# Altium PCB TIDA01398_TID.PcbDoc (part 2 of 2)
Units mil, origin at the board's own origin, x right, y up, seen from the top; angles counter-clockwise.
Board outline 2952.76 x 1377.95 mil, 4 copper layers (Layer 1 - Top Layer, Layer 2 - GND, Layer 3 - PWR, Layer 4 - Bottom Layer), stack 43.668 mil thick; 120 components, 47 nets, 270 pads, 188 vias.
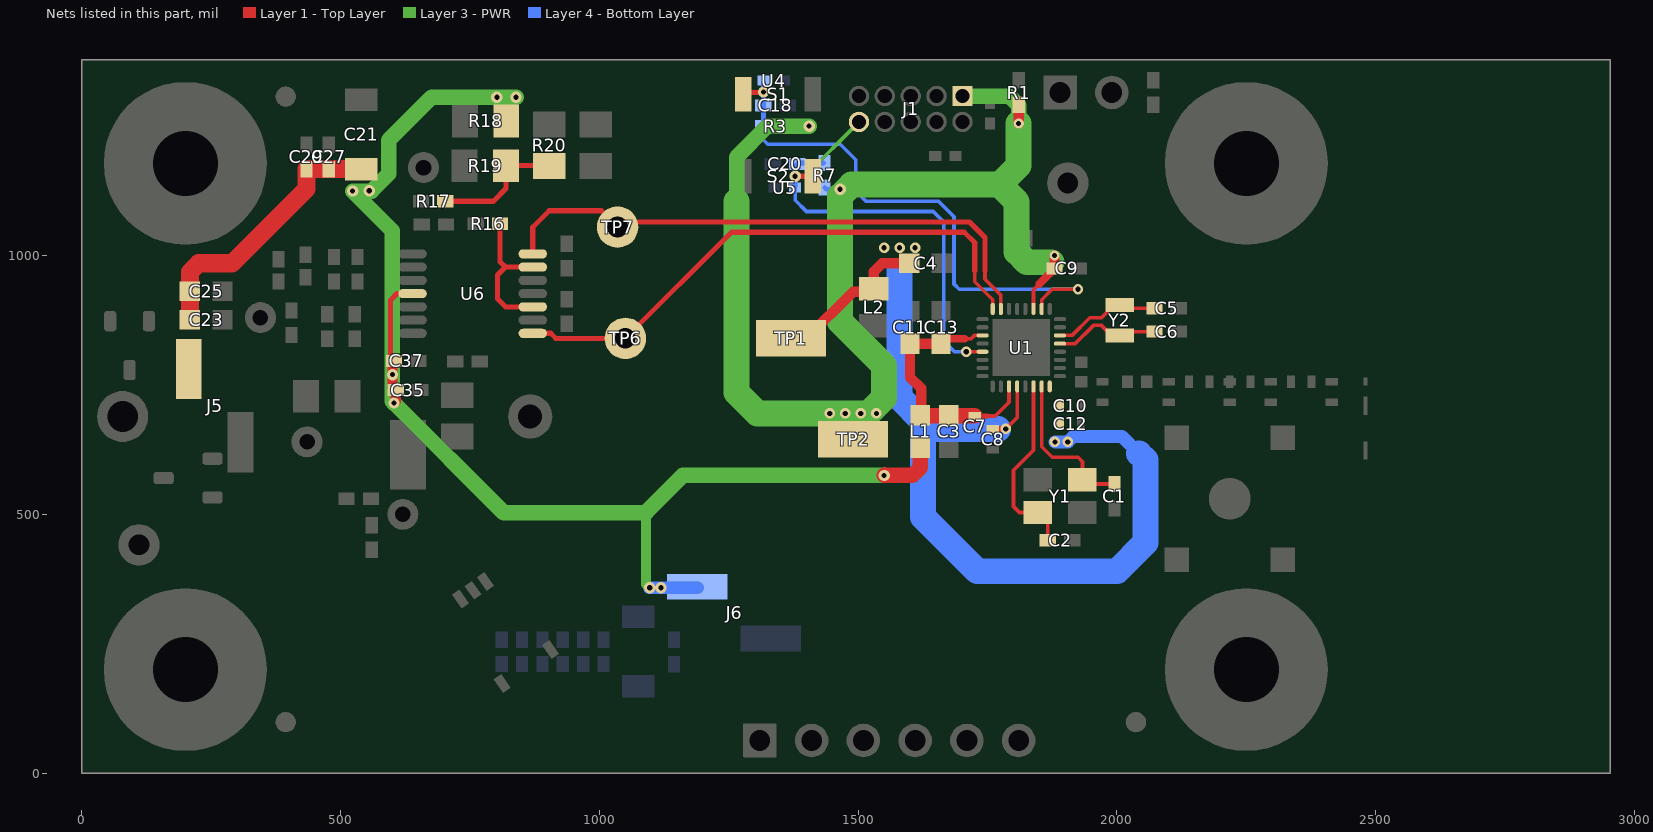
[diagram p4: the nets of this part, all layers, seen from the top]

## Via types
v1: diameter 20, hole 10, Layer 1 - Top Layer to Layer 4 - Bottom Layer, tented both sides, 125 vias
v2: diameter 22, hole 10, Layer 1 - Top Layer to Layer 4 - Bottom Layer, tented both sides, 47 vias
v3: diameter 19.68, hole 7.87, Layer 1 - Top Layer to Layer 4 - Bottom Layer, tented both sides, 16 vias

## Nets (pads, with @x,y where several pads share a name; then routed paths per layer and width w, separated by ;. In a path a pad name is that pad's centre, name@x,y a point inside that pad or via, vN(x,y) a via of type N, cw(c..) or ccw(c..) an arc to the next point about the centre after c; other vN are vias at no path point) (continued)
NetR16_2: R16.2 U6.10 U6.13 | length 283.1
  Layer 1 - Top Layer w10: R16.2@808,1061.46 808,987.82 818.18,977.64 ; U6.10@871.14,900.87 818.59,900.87 803,916.46 803,962.46 818.18,977.64 ; U6.13@871.14,977.64 818.18,977.64
NetR17_2: R17.2 R19.1 R20.2 | length 255.6
  Layer 1 - Top Layer w10: R17.2@702.24,1105 795,1105 819.48,1129.48 R19.1@819.48,1173.8 902.14,1173.8 R20.2@903,1172.94
NRESET: C20.2 J1.10 R7.1 S2.2 U1.21 U5.1 | length 942.4
  Layer 1 - Top Layer w7: v1(1708.75,814.13) U1.21@1740.2,814.13
  Layer 1 - Top Layer w10: v2(1378.09,1153.3) v2(1378.09,1153.3) S2.2@1411.93,1153.26
  Layer 3 - PWR w7: v2(1378.09,1153.3) 1396.53,1153.3 J1.10@1501.42,1258.19
  Layer 4 - Bottom Layer w7: U5.1@1378.05,1133.59 1378.05,1106.95 1400,1085 1645,1085 1665,1065 1665,835 1685.87,814.13 v1(1708.75,814.13)
  Layer 4 - Bottom Layer w10: U5.1@1378.05,1133.59 1378.05,1172.96 1383.96,1178.87 R7.1@1433.17,1178.87
PIR_OUT_HI: TP6.1 U1.16 U6.8 | length 1093.7
  Layer 1 - Top Layer w7: 1725,970 1725,949.62 1759.88,914.74 U1.16@1759.88,896.8
  Layer 1 - Top Layer w10: U6.8@871.14,849.68 905.77,849.68 915.46,840 TP6.1@1050,840 1255,1045 1705,1045 1725,1025 1725,970
PIR_OUT_LO: TP7.1 U1.15 U6.14 | length 1137.2
  Layer 1 - Top Layer w7: 1745,970 1745,954.42 1775.63,923.79 U1.15@1775.63,896.8
  Layer 1 - Top Layer w10: U6.14@871.14,1003.23 871.14,1054.6 903,1086.46 1003.54,1086.46 TP7.1@1035,1055 ; TP7.1@1040,1050 1055,1065 1715,1065 1745,1035 1745,970 ; TP7.1@1050,1061.46 TP7.1@1065,1046.46
USR_BTN: C18.2 R3.1 S1.2 U1.10 U4.1 | length 1087
  Layer 1 - Top Layer w7: U1.10@1854.37,896.8 1854.37,914.75 1874.62,935 v1(1924.62,935)
  Layer 1 - Top Layer w10: S1.2@1278.07,1312 1281.07,1315 1315.97,1315 v2(1316.97,1316)
  Layer 4 - Bottom Layer w7: R3.1@1316.38,1250 1316.38,1223.62 1325,1215 1465,1215 1495,1185 1495,1125 1515,1105 1655,1105 1685,1075 1685,945 1695,935 v1(1924.62,935)
  Layer 4 - Bottom Layer w10: R3.1@1316.97,1250 v2(1316.97,1316) U4.1@1316.97,1334.41
V_BATT: C21.1 C23.1 C25.1 C27.1 C29.1 C35.2 C37.1 J5.2 J6.2 L1.1 R18.2 U6.4 | length 3079.6
  Layer 1 - Top Layer w10: v2@596,770 596,913.46 609,926.46 U6.4@638.86,926.46
  Layer 1 - Top Layer w20: C35.2@600,746.38 v2(600,770) 600,793.42 C37.1@603.03,796.46 ; v2(603,715) 606.38,718.38 C35.2@606.38,740
  Layer 1 - Top Layer w30: v2(1550,575) 1605,575 1620,590 L1.1@1620,628.5
  Layer 1 - Top Layer w35: C23.1@208.5,876.18 208.5,968.5 225,985 290,985 433.7,1128.7 C29.1@433.7,1166.97 C21.1@540,1166.97
  Layer 3 - PWR w20: v2@1090,365.07 1090,503
  Layer 3 - PWR w30: v2(838.76,1306) v2(801.76,1306) 676,1306 592.68,1222.68 592.68,1157.68 559.65,1124.65 v2(523.03,1124.65) 600,1047.68 v2(600,770) 600,718 v2(603,715) 815,503 1090,503 1090,504 1161,575 v2(1550,575)
  Layer 4 - Bottom Layer w25: v2(1097,358.07) v2(1119,358.07) J6.2@1189.14,358.07
  other v2: 555,1125.35
VDDR: C4.2 C8.1 C10.1 C12.1 L2.2 TP1.1 U1.28 U1.32 | length 1898.5
  Layer 1 - Top Layer w7: v1(1785,665) 1807.13,687.13 U1.28@1807.13,747.2
  Layer 1 - Top Layer w12: C8.1@1760,665 v1(1785,665)
  Layer 1 - Top Layer w20: TP1.1@1395,840 1400,840 1490,930 1524.57,930 L2.2@1530,935.43 1530,969 1546,985 C4.2@1598.5,985
  Layer 4 - Bottom Layer w25: v1(1880,640) v1(1905,640) 1915,650 2010,650 2042.5,617.5
  Layer 4 - Bottom Layer w50: 1580,970 1580,725 1625,680 ; 1770,665 1640,665 1625,680 ; 2042.5,617.5 2055,605 2055,445 2000,390 1730,390 1625,495 1625,680
  other v1: 1550,1015 1580,1015 1610,1015
VDDS: C3.1 C7.1 C9.1 C11.2 C13.2 J1.1 L1.2 R1.2 R3.2 R7.2 TP2.1 U1.11 U1.19 U1.27 | length 2916.7
  Layer 1 - Top Layer w7: 1706,839 1718,839 1724.62,845.62 U1.19@1740.2,845.62 ; 1750,690 1765,690 1791.38,716.38 U1.27@1791.38,747.2 ; U1.11@1838.62,896.8 1838.62,933.62 1850,945
  Layer 1 - Top Layer w10: C7.1@1725,690 1750,690
  Layer 1 - Top Layer w15: C13.2@1660,829.5 1669.5,839 1706,839 ; 1850,945 1879.38,974.38 C9.1@1879.38,975
  Layer 1 - Top Layer w20: L1.2@1621.5,690 1621.5,743.5 1600,765 C11.2@1600,829.5 C13.2@1660,829.5 ; v1(1810,1255) R1.2@1810,1291.38 ; C9.1@1879.38,975 v1(1879.38,1000)
  Layer 1 - Top Layer w30: L1.2@1621.5,690 C7.1@1725,690
  Layer 3 - PWR w30: 1265,1105 1265,1190 1325,1250 v2(1405,1250) ; J1.1@1701.42,1308.19 1791.81,1308.19 1810,1290 v1(1810,1255)
  Layer 3 - PWR w50: 1265,1105 1265,735 1305,695 1520,695 1550,725 1550,787 1465,872 1465,1115 1487,1137 1773,1137 ; v1(1810,1255) 1810,1174 1773,1137 ; 1874,987 1826,987 1806,1007 1806,1104 1773,1137
  Layer 4 - Bottom Layer w9: R7.2@1435,1131.38 1438.38,1128 v2(1465,1128)
  Layer 4 - Bottom Layer w10: R3.2@1363.62,1250 v2(1405,1250)
  other v1: 1445,695 1475,695 1505,695 1535,695
X24M_N: C2.2 U1.30 Y1.3 | length 361.3
  Layer 1 - Top Layer w7: U1.30@1838.62,747.2 1838.62,623.62 1800,585 1800,515 1811.5,503.5 Y1.3@1846.69,503.5 1866.38,483.82 C2.2@1866.38,450
X24M_P: C1.2 U1.31 Y1.1 | length 307.6
  Layer 1 - Top Layer w7: U1.31@1854.37,747.2 1854.37,630.63 1875,610 1925,610 1933.31,601.69 Y1.1@1933.31,566.5 1941.18,558.62 C1.2@1995,558.62
X32K_Q1: C6.1 U1.5 Y2.1 | length 208
  Layer 1 - Top Layer w7: U1.5@1889.8,829.87 1919.5,829.87 1954.62,865 1969.62,865 ; 1970,865 1989.53,845.47 Y2.1@2005,845.47 2012.53,853 C6.1@2072.38,853
X32K_Q2: C5.1 U1.6 Y2.2 | length 209.3
  Layer 1 - Top Layer w7: U1.6@1889.8,845.62 1912.97,845.62 1947.35,880 1969.62,880 ; 1970,880 1994.53,904.53 Y2.2@2005,904.53 2011.53,898 C5.1@2072.38,898
pads on no net: FID1.1 FID2.1 FID3.1 FID4.1 FID5.1 FID6.1 H1.0 H7.0 J1.6 J1.7 J1.8 SH-J1.0 SH-J2.0 SH-J3.0 U1.4 U1.8 U1.22

## Polygon pours and split planes (outlines as drawn)
GND on Layer 1 - Top Layer "Layer 1 - Top Layer - GND" (solid, remove dead copper, pour order 2): 20,20 2464.57,20 2464.57,1355 20,1355
GND on Layer 2 - GND "Layer 2 - GND - GND" (solid, remove dead copper, pour order 4): 20,20 2464.57,20 2464.57,1355 20,1355
GND on Layer 3 - PWR "Layer 3 - PWR - GND" (solid, remove dead copper, pour order 6): 20,20 2464.57,20 2464.57,1355 20,1355
GND on Layer 4 - Bottom Layer "Layer 4 - Bottom Layer - GND" (solid, remove dead copper, pour order 8): 20,1355 20,20 2464.57,20 2464.57,1355

## Keep-outs
Keep-Out Layer:
  lines w10: -5,0 ccw(c0,0) 0,-5 ; -5,0 ccw(c0,0) 0,-5 ; -5,0 -5,1377.95 ; -5,1377.95 cw(c0,1377.95) 0,1382.95 ; -5,1377.95 cw(c0,1377.95) 0,1382.95 ; 0,-5 2952.76,-5 ; 0,1382.95 2952.76,1382.95 ; 2952.76,-5 ccw(c2952.76,0) 2957.76,0 ; 2952.76,-5 ccw(c2952.76,0) 2957.76,0 ; 2952.76,1382.95 cw(c2952.76,1377.95) 2957.76,1377.95 ; 2952.76,1382.95 cw(c2952.76,1377.95) 2957.76,1377.95 ; 2957.76,0 2957.76,1377.95
  text ".Layer_Name" at 577,-858.49 h60

## Other copper
Layer 1 - Top Layer:
  rectangle net V_BATT: 180,720 230,950
  rectangle net NetQ1_2: 120,560 190,621.67
  rectangle net NetBT1_1: 51.18,690 105,800
  rectangle net NetQ1_2: 25,820 80,895
  region net GND: 457.98,699.91 457.98,764.91 374.98,764.91 374.98,699.91
  rectangle net V_BATT: 789.76,1225 854.76,1318
  rectangle net V_BATT: 505,1110 575,1190
  region net NetJ5_1: 240,620 240,590 270,590 280,580 330,580 330,700 280,700 280,630 270,620
  pour cut-out: 2050,370 2380,370 2380,695 2050,695
  pour cut-out: 1490,870 1755,870 1755,980 1700,1035 1490,1035
  region net GND: 1578,873 1578,933 1595,950 1625,950 1640,965 1640,1005 1685,1005 1705,985 1705,926 1752,879 1759,879 1762,876 1762,866 1755,873
  pour cut-out: 1727.4,734.8 1902.6,734.8 1902.6,910 1727.4,910
  pour cut-out: 2464.57,0 2952.76,0 2952.76,1377.95 2464.57,1377.95
  region net GND: 1895,435 1895,530 2010,530 2010,455 1990,435
  region net GND: 2464.57,780.77 2464.57,1355 2415,1355 2415,820 1960,820 1960,780.77
  region net GND: 2464.57,20 2415,20 2415,730 2464.57,730
  region net VDDS: 1570,610 1570,650 1585,665 1695,665 1710,680 1710,700 1695,715 1535,715 1445,715 1420,690 1420,610
  region net GND: 2480,604.06 2460.94,604.06 2455,610 2455,635 2462.43,642.43 2480,642.43
  region net GND: 2480,690.68 2459.32,690.68 2455,695 2455,720 2464.05,729.05 2480,729.05
  region net NetC15_1: 1974,744.3 1919,744.3 1919,768.3 1974,768.3
  region net NetC17_1: 2223,744.3 2230,744.3 2230,768.3 2223,768.3
  region net VDDR: 1866,759 1866,639 1875,630 1910,630 1915,635 1915,645 1900,660 1900,731 1872,759
  pour cut-out: 1833,760 1833,678 1785,630 1785,485 1835,435 1990,435 2010,455 2010,590 1985,615 1876,615 1859,632 1859,760 1869,760 1869,636 1880,625 1990,625 2020,595 2020,450 1995,425 1830,425 1775,480 1775,635 1823,683 1823,760 1823,769 1869,769 1869,760
  pour cut-out: 1725,725 1442.76,725 1407.76,690 1407.76,757.76 1485,835 1725,835
  pour cut-out: 2464.57,730 2242,730 2242,572 2240,570 2200,570 2194,576 2194,730 1916,730 1908,738 1908,763 1925.77,780.77 2464.57,780.77
  region net VDDR: 1620,965 1620,1020 1615,1025 1545,1025 1500,980 1500,910 1560,910 1560,945 1580,965
  pour cut-out: 690,1020 832.38,1020 832.38,1065 855,1065 855,1020 855,826.06 690,826.06
  text ".Layer_Name" at 577,-858.49 h60
Layer 2 - GND:
  pour cut-out: 2464.57,0 2952.76,0 2952.76,1377.95 2464.57,1377.95
  region net GND: 1990,435 1835,435 1785,485 1785,630 1815,660 1815,760 1859,760 1859,632 1876,615 1985,615 2010,590 2010,455
  pour cut-out: 1815,760 1815,660 1785,630 1785,485 1835,435 1990,435 2010,455 2010,590 1985,615 1876,615 1859,632 1859,760 1869,760 1869,636 1880,625 1990,625 2020,595 2020,450 1995,425 1830,425 1775,480 1775,635 1805,665 1805,769 1869,769 1869,760
  text ".Layer_Name" at 577,-858.49 h60
Layer 3 - PWR:
  rectangle net V_BATT: 1080,342.93 1134.14,378.07
  pour cut-out: 2464.57,0 2952.76,0 2952.76,1377.95 2464.57,1377.95
  region net NetQ1_2: 25,830 85,770 110,770 150,730 150,650 120,620 120,585 205,585 205,760 110,855 25,855
  pour cut-out: 1815,760 1815,660 1785,630 1785,485 1835,435 1990,435 2010,455 2010,590 1985,615 1876,615 1859,632 1859,760 1869,760 1869,636 1880,625 1990,625 2020,595 2020,450 1995,425 1830,425 1775,480 1775,635 1805,665 1805,769 1869,769 1869,760
  text ".Layer_Name" at 577,-858.49 h60
Layer 4 - Bottom Layer:
  pour cut-out: 2464.57,0 2952.76,0 2952.76,1377.95 2464.57,1377.95
  pour cut-out: 1815,760 1815,660 1785,630 1785,485 1835,435 1990,435 2010,455 2010,590 1985,615 1876,615 1859,632 1859,760 1869,760 1869,636 1880,625 1990,625 2020,595 2020,450 1995,425 1830,425 1775,480 1775,635 1805,665 1805,769 1869,769 1869,760
  region net VDDR: 1560,955 1540,975 1540,1025 1620,1025 1620,975 1600,955
  text ".Layer_Name" at 577,-858.49 h60

## Silkscreen, mask and mechanical layers (free items; w line width, h text height)
Top Overlay:
  text ".Layer_Name" at 577,-858.49 h60
Bottom Overlay:
  text ".Layer_Name" at 577,-858.49 h60
Top Paste:
  text ".Layer_Name" at 577,-858.49 h60
Bottom Paste:
  text ".Layer_Name" at 577,-858.49 h60
Top Solder:
  text ".Layer_Name" at 577,-858.49 h60
  text ".Layer_Name" at 577,-858.49 h60
Bottom Solder:
  text ".Layer_Name" at 577,-858.49 h60
Drill Guide:
  text ".Layer_Name" at 577,-858.49 h60
M1 Board Outline:
  the board outline again, w10
  text "SLOT" at 980,290 h40 r30.14
  text "SLOT" at 635,90 h40 r30.14
  text ".Layer_Name" at 577,-858.49 h60
M2 Board Dimensions:
  rectangle: 125,-400 500,-275
  rectangle: 0,-275 125,-150
  lines w7: 0,-275 1000,-275 ; 125,-400 125,-150 ; 250,-400 250,-150 ; 500,-400 500,-150 ; 750,-400 750,-150 ; 0,-400 0,-150 1000,-150 1000,-400 0,-400
  text ".Layer_Name" at 577,-858.49 h60
M3 3D STEP Top:
  text ".Layer_Name" at 577,-858.49 h60
M4 3D STEP Bottom:
  text ".Layer_Name" at 577,-858.49 h60
M5 Assembly Top:
  lines w10: -292,-930.17 6308,-930.17 ; -292,-726.83 6310,-726.83 ; -292,-523.5 -292,-1133.5 3713,-1133.5 6310,-1133.5 6310,-523.5 -291.5,-523.5 -291.5,-1133.5 1284,-1133.5 ; 2173,-1133.5 2173,-523.5 ; 3440,-726.83 3440,-523.5 ; 4280,-726.83 4280,-523.5 ; 4902,-1140 4902,-937.17
  text "COMPONENTS MARKED 'DNP' SHOULD NOT BE POPULATED." at 1153.5,-318.5 h60
  text "ASSEMBLY VARIANT:" at 1153,-434 h60
  text ".VariantName" at 2189,-434 h60
  text "PCB VIEWED FROM TOP SIDE" at -228.5,-655.67 h60
  text "BOARD #:" at 2248,-655.67 h60
  text ".PRJ_Number" at 2793.5,-655.67 h60
  text "REV:" at 3638,-655.67 h60
  text ".PCB_Rev" at 3929.5,-655.67 h60
  text "SVN REV:" at 4476,-655.67 h60
  text ".VersionControl_RevNumber" at 4982,-655.67 h60
  text "TID #:" at 2248,-859 h60
  text ".TID" at 2793.5,-859 h60
  text "PLOT NAME =" at -228.5,-1064.34 h60
  text ".plot_File_Name" at 577,-1064.34 h60
  text "GENERATED    :" at 2250,-1064.34 h60
  text ".Print_Date" at 3119.5,-1064.34 h60
  text ".Print_Time" at 3848.5,-1064.34 h60
  text "TEXAS INSTRUMENTS" at 5113,-1064.34 h60
M6 Assembly Bottom:
  lines w10: -292.5,-727.33 6309.5,-727.33 ; -290.5,-930.67 6309.5,-930.67 ; 1115.5,-1140.5 1115.5,-937.67 ; 1737.5,-727.33 1737.5,-524 ; 2577.5,-727.33 2577.5,-524 ; 3844.5,-1134 3844.5,-524 ; 4733.5,-1134 6309,-1134 6309,-524 -292.5,-524 -292.5,-1134 2304.5,-1134 6309.5,-1134 6309.5,-524
  text "COMPONENTS MARKED 'DNP' SHOULD NOT BE POPULATED." at 6102,-318 h60
  text ".VariantName" at 5058,-434 h60
  text "ASSEMBLY VARIANT:" at 6097,-434 h60
  text ".VersionControl_RevNumber" at 1035.5,-656.17 h60
  text "SVN REV:" at 1541.5,-656.17 h60
  text ".PCB_Rev" at 2088,-656.17 h60
  text "REV:" at 2379.5,-656.17 h60
  text ".PRJ_Number" at 3224,-656.17 h60
  text "BOARD #:" at 3769.5,-656.17 h60
  text "PCB VIEWED FROM BOTTOM SIDE" at 6246,-656.17 h60
  text ".TID" at 3224,-859.5 h60
  text "TID #:" at 3769.5,-859.5 h60
  text "TEXAS INSTRUMENTS" at 904.5,-1064.84 h60
  text ".Print_Time" at 2169,-1064.84 h60
  text ".Print_Date" at 2898,-1064.84 h60
  text "GENERATED    :" at 3767.5,-1064.84 h60
  text ".plot_File_Name" at 5440.5,-1064.84 h60
  text "PLOT NAME =" at 6246,-1064.84 h60
M9 Title Sheet:
  drawing of 57 lines, arcs and shapes, not listed
  text "1" at 739.84,8036.5 h70
  text "2" at 3235.5,8036.5 h70
  text "3" at 5724.84,8036.5 h70
  text "4" at 8231.51,8036.5 h70
  text "5" at 10730.5,8036.5 h70
  text "6" at 13235.5,8036.5 h70
  text "A" at -416.5,6893.5 h70
  text "A" at 14383.5,6893.5 h70
  text "B" at -416.5,4513.5 h70
  text "B" at 14383.5,4513.5 h70
  text "C" at -416.5,2138.5 h70
  text "C" at 14383.5,2138.5 h70
  text "PROJECT TITLE:" at 11343.5,277.5 h45
  text ".PRJ_Title" at 11393.5,144.17 h70
  text "DESIGNED FOR:" at 11343.5,-23.5 h45
  text ".PRJ_Customer" at 11393.5,-163.5 h70
  text "D" at -416.5,-231.5 h70
  text "D" at 14383.5,-231.5 h70
  text "FILE NAME:" at 11343.5,-323.5 h45
  text ".PCB_File_Name_No_Path" at 11393.5,-443.5 h70
  text "Texas Instruments (TI) and/or its licensors do not warrant the accuracy or completeness of this specification" at 6374,-605.34 h45
  text "ENGINEER:" at 11343.5,-613.5 h45
  text "LAYOUT BY:" at 12848.5,-613.5 h45
  text "or any information contained therein. TI and/or its licensors do not warrant that this design will meet" at 6329.01,-718 h45
  text ".PRJ_Engineer" at 11393.5,-768.49 h70
  text ".PCB_Layout" at 12899,-768.49 h70
  text "the specifications, will be suitable for your application or fit for any particular purpose, or will operate in" at 6329.01,-830.67 h45
  text ".Layer_Name" at 577,-858.49 h60
  text "ALTIUM DESIGNER VERSION:" at 12848.5,-923.5 h45
  text "an implementation. TI and/or its licensors do not warrant that the design is production worthy. You should" at 6329.01,-943.33 h45
  text "completely validate and test your design implementation to confirm the system functionality for your application." at 6374,-1056 h45
  text ".print_Scale" at 11393.5,-1056.83 h70
  text ".Application_BuildNumber" at 12899,-1056.83 h70
  text "1" at 739.84,-1263.5 h70
  text "2" at 3235.5,-1263.5 h70
  text "3" at 5724.84,-1263.5 h70
  text "4" at 8231.51,-1263.5 h70
  text "5" at 10730.5,-1263.5 h70
  text "6" at 13235.5,-1263.5 h70
M10 Fab Notes:
  drawing of 186 lines, arcs and shapes, not listed
  text "DESIGN INFORMATION" at 12381.02,5910 h60
  text "MIN. TRACK WIDTH:" at 11736.46,5730 h60
  text "6" at 12832.7,5730 h60
  text "MIL" at 12987.46,5730 h60
  text "Impedance Control:" at 6857,5615 h200
  text "MIN. CLEARANCE:" at 11736.46,5598 h60
  text "mm" at 12987.46,5598 h60
  text "6" at 12830,5595 h60
  text "MIN. VIA PAD SIZE:" at 11736.46,5466 h60
  text "20" at 12802.71,5466 h60
  text "MIL" at 12987.46,5466 h60
  text "- Top layer contains 50 ohm impedance (+/- 10%) single ended using 24 mil lines (from E1 to U1)" at 6857,5375 h100
  text "0.05mm (2MIL)" at 12431.46,5324.29 h60
  text "MINIMUM ANNULAR RING" at 11407.23,5320 h60
  text "EXTERNAL" at 13139.46,5320 h60
  text "PER" at 11607.23,5202 h60
  text "IPC-D-275 CLASS 2 LEVEL C" at 11827.23,5202 h60
  text "MIL, HOLES" at 13315.46,5089.71 h60
  text "+/-" at 12923,5089 h60
  text "+/-" at 13777,5089 h60
  text "REGISTRATION TOLERANCES:" at 11407.23,5084 h60
  text "METAL" at 12607,5084 h60
  text "5" at 13183.2,5084 h60
  text "3" at 14016.2,5084 h60
  text "MIL" at 14132.46,5084 h60
  text "MATERIAL:" at 11332.46,4874.54 h60
  text "FR-4 High Tg" at 12318.9,4734.21 h60
  text "FR-408" at 11753.46,4725.64 h60
  text "X" at 12165.46,4725.64 h60
  text "OTHER" at 13241.46,4725.64 h60
  text "62 MIL (1.6mm) +/-10%" at 12073.56,4562.92 h60
  text "THICKNESS:" at 11407.23,4558.64 h60
  text "31 MIL (0.8mm) +/-10%" at 13348.56,4557.92 h60
  text "X" at 13230,4550 h60
  text "TOLERANCE:" at 11407.23,4400.64 h60
  text "X" at 12246.53,4400.64 h60
  text "ANSI IPC-6012 TYPE 3 CLASS 2" at 12433.48,4400.64 h60
  text "OTHER +/-" at 12433.46,4244.64 h60
  text "BOW & TWIST:" at 11407.23,4087.64 h60
  text "X" at 12246.53,4087.64 h60
  text "ANSI IPC-6012 TYPE 3 CLASS 2" at 12433.48,4087.64 h60
  text "OTHER +/-" at 12433.46,3929.13 h60
  text "DRILLING:" at 11332.46,3790.64 h60
  text "REFERENCE:" at 11407.23,3673.64 h60
  text "X" at 12055.46,3673.64 h60
  text "AS SHOWN" at 12242.46,3673.64 h60
  text "X" at 12956.46,3673.64 h60
  text "NC_DRILL FILES" at 13093.46,3673.64 h60
  text "PTH MIN COPPER THICKNESS:" at 11407.23,3515.64 h60
  text "X" at 12757.46,3515.64 h60
  text "1MIL" at 12894.46,3515.64 h60
  text "OTHER" at 13391.46,3515.64 h60
  text "BOARD FINISH:" at 11332.46,3356.64 h60
  text "SILKSCREEN:" at 11487.68,3238.64 h60
  text "X" at 12436.46,3238.64 h60
  text "TOP" at 12562.46,3238.64 h60
  text "X" at 12946.46,3238.64 h60
  text "BOTTOM" at 13073.46,3238.64 h60
  text "SILKSCREEN COLOR:" at 11487.68,3071.64 h60
  text "X" at 12435.42,3071.64 h60
  text "WHITE" at 12562.46,3071.64 h60
  text "OTHER" at 13073.46,3071.64 h60
  text "SOLDER RESIST COLOR:" at 11487.68,2901.64 h60
  text "X" at 12055.42,2742.44 h60
  text "GREEN" at 12182.46,2742.44 h60
  text "BLUE" at 12773.46,2742.44 h60
  text "OTHER" at 13311.46,2742.44 h60
  text "IMMERSION GOLD (ENIG)" at 12393.46,2553.92 h60
  text "ENEPIG" at 13731,2550.64 h60
  text "SURFACE FINISH:" at 11332.46,2549.64 h60
  text "X" at 12206.51,2549.64 h60
  text "IMM. TIN/SILVER OR EQUIV" at 11662,2392.64 h60
  text "OTHER" at 13093.46,2392.64 h60
  text "ARRAY/PANEL:" at 11332.46,2213.64 h60
  text "CUT AND TRIM PER MECH LAYER 1" at 12393.46,2209.35 h60
  text "N.C. ROUTE" at 12393.46,2057.64 h60
  text "X" at 13072.46,2057.64 h60
  text "V. SCORE" at 13259.46,2057.64 h60
  text "CERTIFICATION:" at 11332.46,1920.64 h60
  text "MATERIALS AND WORKMANSHIP FOR ALL PCBS" at 12057.46,1920.64 h60
  text "TO MEET OR EXCEED THE REQUIREMENTS OF:" at 12057.46,1822.64 h60
  text "X" at 11683.96,1686.13 h60
  text "ANSI IPC-A-600F CLASS ->" at 11822.96,1686.13 h60
  text "X" at 13462.02,1686.13 h60
  text "2" at 13580.96,1686.14 h60
  text "1" at 13265.96,1684.64 h60
  text "3" at 13934.96,1684.64 h60
  text "X" at 11686.02,1526.64 h60
  text "UL 94V-0" at 11822.96,1526.64 h60
  text "X" at 12498.02,1526.64 h60
  text "RoHS" at 12634.96,1526.64 h60
  text "OTHER" at 13279.36,1526.64 h60
  text "PER ORDER" at 13676.42,1526.64 h60
  text "ADDITIONAL REQUIREMENTS:" at 11332.46,1385.64 h60
  text "MICROSECTION:" at 11407.23,1270.64 h60
  text "YES" at 12312.96,1270.64 h60
  text "REQUIRED" at 13174.46,1114.49 h60
  text "BARE BOARD ELEC. TEST:" at 11407.23,1111.64 h60
  text "NONE" at 12712.96,1111.64 h60
  text "X" at 13047.46,1111.64 h60
  text "PER ORDER" at 13766.46,1111.64 h60
  text "MANUFACTURER'S UL:" at 11407.23,954.64 h60
  text "RAIL" at 12572.96,950.35 h60
  text "METAL" at 13064.77,950.35 h60
  text "X" at 13440,950 h60
  text "SILK" at 13576.46,950.35 h60
  text ".Layer_Name" at 577,-858.49 h60
M11 Gerber Information:
  lines w10: -292,-930.17 6308,-930.17 ; -292,-726.83 6310,-726.83 ; -292,-523.5 -292,-1133.5 3713,-1133.5 6310,-1133.5 6310,-523.5 -291.5,-523.5 -291.5,-1133.5 1284,-1133.5 ; 2173,-1133.5 2173,-523.5 ; 3440,-726.83 3440,-523.5 ; 4280,-726.83 4280,-523.5 ; 4902,-1140 4902,-937.17
  text "ALL ARTWORK VIEWED FROM TOP SIDE" at -228.5,-655.67 h60
  text "BOARD #:" at 2248,-655.67 h60
  text ".PRJ_Number" at 2793.5,-655.67 h60
  text "REV:" at 3638,-655.67 h60
  text ".PCB_Rev" at 3929.5,-655.67 h60
  text "SVN REV:" at 4476,-655.67 h60
  text ".VersionControl_RevNumber" at 4982,-655.67 h60
  text "LAYER NAME =" at -228.5,-858.49 h60
  text "TID #:" at 2248,-859 h60
  text ".TID" at 2793.5,-859 h60
  text "PLOT NAME =" at -228.5,-1064.34 h60
  text ".plot_File_Name" at 577,-1064.34 h60
  text "GENERATED    :" at 2250,-1064.34 h60
  text ".Print_Date" at 3119.5,-1064.34 h60
  text ".Print_Time" at 3848.5,-1064.34 h60
  text "TEXAS INSTRUMENTS" at 5113,-1064.34 h60
M12 Stackup:
  drawing of 295 lines, arcs and shapes, not listed
  text "Layer" at 9315,7840 h60
  text "Name" at 9724.91,7840 h60
  text "Material" at 11134.5,7840 h60
  text "Thickness" at 11994.27,7840 h60
  text "Constant" at 12644.1,7840 h60
  text "Board Layer Stack" at 13213.97,7840 h60
  text "1" at 9315,7720 h60
  text "Top Overlay" at 9724.91,7720 h60
  text "2" at 9315,7600 h60
  text "Top Solder" at 9724.91,7600 h60
  text "Solder Resist" at 11134.5,7600 h60
  text "0.40mil" at 11994.27,7600 h60
  text "3.5" at 12644.1,7600 h60
  text "3" at 9315,7480 h60
  text "Layer 1 - Top Layer" at 9724.91,7480 h60
  text "Copper" at 11134.5,7480 h60
  text "1.42mil" at 11994.27,7480 h60
  text "4" at 9315,7360 h60
  text "Dielectric 1" at 9724.91,7360 h60
  text "370HR" at 11134.5,7360 h60
  text "14.00mil" at 11994.27,7360 h60
  text "4.2" at 12644.1,7360 h60
  text "5" at 9315,7240 h60
  text "Layer 2 - GND" at 9724.91,7240 h60
  text "Copper" at 11134.5,7240 h60
  text "1.42mil" at 11994.27,7240 h60
  text "6" at 9315,7120 h60
  text "Dielectric 2" at 9724.91,7120 h60
  text "370HR" at 11134.5,7120 h60
  text "10.00mil" at 11994.27,7120 h60
  text "4.2" at 12644.1,7120 h60
  text "7" at 9315,7000 h60
  text "Layer 3 - PWR" at 9724.91,7000 h60
  text "Copper" at 11134.5,7000 h60
  text "1.42mil" at 11994.27,7000 h60
  text "8" at 9315,6880 h60
  text "Dielectric 3" at 9724.91,6880 h60
  text "370HR" at 11134.5,6880 h60
  text "14.00mil" at 11994.27,6880 h60
  text "4.2" at 12644.1,6880 h60
  text "9" at 9315,6760 h60
  text "Layer 4 - Bottom Layer" at 9724.91,6760 h60
  text "Copper" at 11134.5,6760 h60
  text "1.42mil" at 11994.27,6760 h60
  text "10" at 9315,6640 h60
  text "Bottom Solder" at 9724.91,6640 h60
  text "Solder Resist" at 11134.5,6640 h60
  text "0.40mil" at 11994.27,6640 h60
  text "3.5" at 12644.1,6640 h60
  text "11" at 9315,6520 h60
  text "Bottom Overlay" at 9724.91,6520 h60
  text ".Layer_Name" at 577,-858.49 h60
M13 Component Bodies Top:
  text ".Layer_Name" at 577,-858.49 h60
M14 Component Bodies Bottom:
  text ".Layer_Name" at 577,-858.49 h60
M15 Courtyards Top:
  text ".Layer_Name" at 577,-858.49 h60
M16 Courtyards Bottom:
  text ".Layer_Name" at 577,-858.49 h60
Drill Drawing:
  circle w10: c6908.61,4080.78 r16.55
  circle w10: c6908.61,4080.78 r27.59
  lines w10: 6881.03,3818.69 6894.82,3818.69 6894.82,3804.9 6922.41,3804.9 6922.41,3818.69 6936.2,3818.69 6936.2,3846.28 6922.41,3846.28 6922.41,3860.07 6894.82,3860.07 6894.82,3846.28 6881.03,3846.28 6881.03,3818.69 ; 6881.03,3929.05 6936.2,3929.05 6936.2,3984.22 6881.03,3984.22 6881.03,3929.05 ; 6881.03,4191.14 6894.82,4191.14 6908.61,4177.35 6922.41,4191.14 6936.2,4191.14 6922.41,4204.93 6936.2,4218.73 6922.41,4218.73 6908.61,4232.52 6894.82,4218.73 6881.03,4218.73 6894.82,4204.93 6881.03,4191.14 ; 6881.03,4356.67 6936.2,4356.67 6908.61,4301.49 6881.03,4356.67 ; 6881.03,4425.65 6908.61,4439.44 6936.2,4425.65 6922.41,4453.23 6936.2,4480.82 6908.61,4467.03 6881.03,4480.82 6894.82,4453.23 6881.03,4425.65 ; 6881.03,4549.8 6881.03,4563.59 6894.82,4577.38 6881.03,4591.18 6881.03,4604.97 6894.82,4604.97 6908.61,4591.18 6922.41,4604.97 6936.2,4604.97 6936.2,4591.18 6922.41,4577.38 6936.2,4563.59 6936.2,4549.8 6922.41,4549.8 6908.61,4563.59 6894.82,4549.8 6881.03,4549.8 ; 6892.06,3824.21 6900.34,3824.21 6900.34,3815.93 6916.89,3815.93 6916.89,3824.21 6925.17,3824.21 6925.17,3840.76 6916.89,3840.76 6916.89,3849.04 6900.34,3849.04 6900.34,3840.76 6892.06,3840.76 6892.06,3824.21 ; 6892.06,3940.08 6925.17,3940.08 6925.17,3973.19 6892.06,3973.19 6892.06,3940.08 ; 6892.06,4196.66 6900.34,4196.66 6908.61,4188.38 6916.89,4196.66 6925.17,4196.66 6916.89,4204.93 6925.17,4213.21 6916.89,4213.21 6908.61,4221.49 6900.34,4213.21 6892.06,4213.21 6900.34,4204.93 6892.06,4196.66 ; 6892.06,4436.68 6908.61,4444.96 6925.17,4436.68 6916.89,4453.23 6925.17,4469.79 6908.61,4461.51 6892.06,4469.79 6900.34,4453.23 6892.06,4436.68 ; 6892.06,4560.83 6892.06,4569.11 6900.34,4577.38 6892.06,4585.66 6892.06,4593.94 6900.34,4593.94 6908.61,4585.66 6916.89,4593.94 6925.17,4593.94 6925.17,4585.66 6916.89,4577.38 6925.17,4569.11 6925.17,4560.83 6916.89,4560.83 6908.61,4569.11 6900.34,4560.83 6892.06,4560.83
  lines w12: 6831,3767.65 8808.25,3767.65 ; 6831,4760.85 8808.25,4760.85 ; 7168.73,3643.5 7168.73,4885 ; 7500.6,3643.5 7500.6,4885 ; 8136.97,3643.5 8136.97,4885 ; 8395.95,3643.5 8395.95,4885 ; 6831,3643.5 8808.25,3643.5 8808.25,4885 6831,4885 6831,3643.5
  text "Symbol" at 6905.49,4798.1 h72
  text "Quantity" at 7205.98,4798.1 h72
  text "Finished Hole Size" at 7537.84,4798.1 h72
  text "Plated" at 8174.21,4798.1 h72
  text "Hole Type" at 8433.2,4798.1 h72
  text "16" at 7205.98,4673.94 h60
  text "7.87mil (0.200mm)" at 7537.84,4673.94 h60
  text "PTH" at 8174.21,4673.94 h60
  text "Round" at 8433.2,4673.94 h60
  text "A" at 6880.23,4663.95 h55.18
  text "172" at 7205.98,4549.8 h60
  text "10.00mil (0.254mm)" at 7537.84,4549.8 h60
  text "PTH" at 8174.21,4549.8 h60
  text "Round" at 8433.2,4549.8 h60
  text "10" at 7205.98,4425.65 h60
  text "27.56mil (0.700mm)" at 7537.84,4425.65 h60
  text "PTH" at 8174.21,4425.65 h60
  text "Round" at 8433.2,4425.65 h60
  text "4" at 7205.98,4301.49 h60
  text "30.00mil (0.762mm)" at 7537.84,4301.49 h60
  text "PTH" at 8174.21,4301.49 h60
  text "Round" at 8433.2,4301.49 h60
  text "12" at 7205.98,4177.35 h60
  text "40.00mil (1.016mm)" at 7537.84,4177.35 h60
  text "PTH" at 8174.21,4177.35 h60
  text "Round" at 8433.2,4177.35 h60
  text "1" at 7205.98,4053.19 h60
  text "46.50mil (1.181mm)" at 7537.84,4053.19 h60
  text "PTH" at 8174.21,4053.19 h60
  text "Round" at 8433.2,4053.19 h60
  text "1" at 7205.98,3929.05 h60
  text "59.06mil (1.500mm)" at 7537.84,3929.05 h60
  text "PTH" at 8174.21,3929.05 h60
  text "Round" at 8433.2,3929.05 h60
  text "4" at 7205.98,3804.9 h60
  text "125.98mil (3.200mm)" at 7537.84,3804.9 h60
  text "PTH" at 8174.21,3804.9 h60
  text "Round" at 8433.2,3804.9 h60
  text "220 Total" at 7205.98,3680.74 h60
  text ".Layer_Name" at 577,-858.49 h60

## Dimensions
0,0 to 2952.76,0 on M2 Board Dimensions
0,0 to 0,1377.95 on M2 Board Dimensions
0,-400 to 1000,-400 on M2 Board Dimensions

## Text inside footprints (layer, text, board x,y; h text height)
Logo2: Top Overlay "For evaluation only;" at 1299.84,196.64 h60; Top Overlay "not FCC approved for resale." at 1187.46,143.26 h60
Logo3: Top Overlay "Pb" at 1900.4,46.1 h60